# EAGLE board sch (EAGLE 9.6.2)
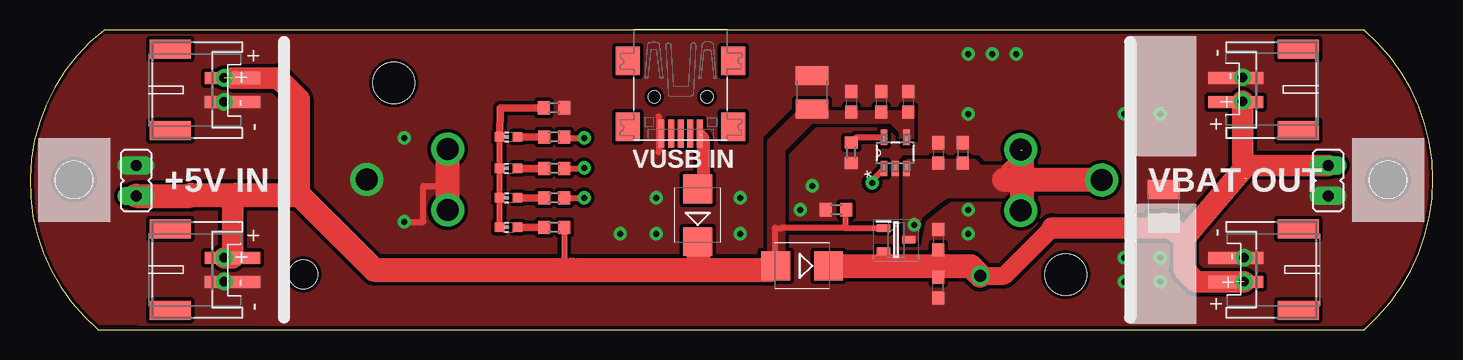
[diagram p0: board, top side]
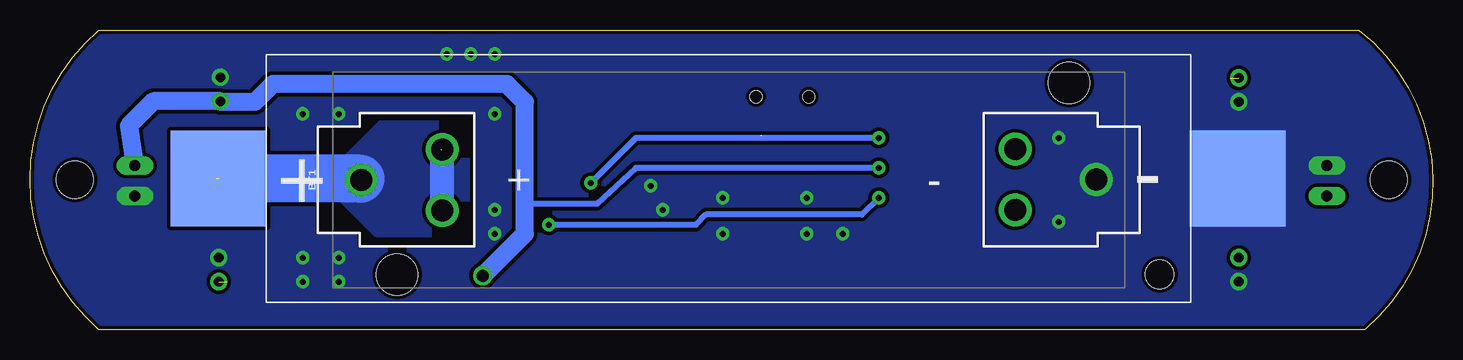
[diagram p1: board, bottom side, seen from below]

Size 116.91 x 25 mm. Coordinates in mm from the lower left corner, seen from the top.
Outline: 5.68,0 111.18,0 arc99 111.18,25 6.18,25 arc102 5.68,0
Copper layers (1*16): Top 0.035mm / dielectric 1.5mm / Bottom 0.035mm
Design rules "default *": minimum track width 12mil, minimum drill 0.35mm, track to track 12mil, track to pad 12mil, pad to pad 12mil, via to via 12mil, smd to smd 6mil, copper to edge 12mil, drill to drill 6mil, minimum pad ring 12mil, minimum via ring 12mil, stop-mask expansion 4mil, vias tented up to drill 33mil, thermal gap 10mil
Holes 3.1 mm at 3.68,12.5 113.18,12.5

## Footprints (pad centres in the part's own frame; a part is rotated, then mirrored left to right if it is on the bottom)
BATTERY_18650-HOLDER = drill 1.829: GND@1 30.628,0.01; GND@2 23.88,2.55; GND@3 23.88,-2.53; PWR@1 -30.628,-0.01; PWR@2 -23.88,2.53; PWR@3 -23.88,-2.55
C0603 = smd 1.1 x 1: 1 -0.85,0; 2 0.85,0
C1210 = smd 1.6 x 2.7: 1 -1.4,0; 2 1.4,0
USB-MINIB = smd 0.5 x 2.308: D+ 0,4.064; D- -0.8,4.064; GND 1.6,4.064; ID 0.8,4.064; VBUS -1.6,4.064 | smd 2 x 2.4: GND1 -4.4,-2; GND2 -4.4,3.5; GND3 4.4,3.5; GND4 4.4,-2 | hole 1: -2.2,1; 2.2,1
JST-PH-2-SMT-RA = smd 1 x 4.6: 1 1,-3.7; 2 -1,-3.7 | smd 1.6 x 3.4: NC1 -3.4,1.5; NC2 3.4,1.5
JST-PH-2-THM-RA = drill 0.8 pad 1.422: 1 1,0; 2 -1,0
SMB = smd 2.4 x 2.4: A 2.2,0; C -2.2,0
SOT96P240X100-3N = smd 1.1 x 0.65: 1 -1.05,0.96; 2 -1.05,-0.96; 3 1.05,0
JP1 = drill 0.914 long: 1 0,-1.27; 2 0,1.27
CHIP-LED0603 = smd 0.8 x 0.8: A 0,-0.75; C 0,0.75
R0603 = smd 1 x 1.1: 1 -0.85,0; 2 0.85,0
SMT18650_18650SMT = smd 8 x 8: BATTERY_NEGATIVE 80.98,10.32; BATTERY_POSITIVE -3.95,10.32 | hole 3.45: 66.925,18.325; 10.925,2.325 | hole 2.39: 74.455,2.325
SOT95P280X145-5N = smd 1.27 x 0.559: 1 -1.295,0.94; 2 -1.295,0; 3 -1.295,-0.94; 4 1.295,-0.94; 5 1.295,0.94

## Placement (x,y rotation side)
BT1  [BATTERY_18650-HOLDER]  58.68,12.5 0 bottom
C1  [C0603]  73.18,19 270 top
C2  [C0603]  77.71,14.74 270 top
C3  [C0603]  75.67,14.74 270 top
C4  [C0603]  70.93,19 270 top
C5  [C0603]  68.43,19 270 top
C6  [C0603]  75.68,3.5 90 top
C7  [C0603]  75.68,7.5 270 top
C8  [C1210]  65.18,19.8 90 top
C9  [C1210]  94.48,10.3 90 top
CN1  [USB-MINIB]  54.22,20.42 180 top
CN2  [JST-PH-2-SMT-RA]  104.18,5 270 top
CN3  [JST-PH-2-SMT-RA]  104.18,20 270 top
CN4  [JST-PH-2-THM-RA]  101.05,20.05 270 top
CN5  [JST-PH-2-THM-RA]  16.18,20 90 top
CN6  [JST-PH-2-THM-RA]  16.18,5 90 top
CN7  [JST-PH-2-THM-RA]  101.18,5 270 top
CN8  [JST-PH-2-SMT-RA]  13.18,20 90 top
CN9  [JST-PH-2-SMT-RA]  13.18,5 90 top
D1  [SMB]  64.34,5.31 180 top
D2  [SMB]  55.65,9.54 90 top
IC1  DMP1045U-7  [SOT96P240X100-3N]  72.18,7.5 0 top
JP2  [JP1]  108.17,12.43 0 top
JP3  [JP1]  8.84,12.43 0 top
LED1  [CHIP-LED0603]  39.88,13.45 90 top
LED2  [CHIP-LED0603]  39.88,10.99 90 top
LED3  [CHIP-LED0603]  39.88,8.53 90 top
LED4  [CHIP-LED0603]  39.88,16.07 90 top
R1  [R0603]  68.43,14.75 90 top
R2  [R0603]  67.18,10 0 top
R3  [R0603]  43.69,8.53 0 top
R4  [R0603]  43.69,10.99 0 top
R5  [R0603]  43.69,13.45 0 top
R6  [R0603]  43.69,16.07 0 top
R7  [R0603]  43.68,18.5 180 top
U$1  SMT18650_SMT18650  [SMT18650_18650SMT]  97.24,2.27 0 bottom
U$2  MCP73832T-2ACI/OT  [SOT95P280X145-5N]  72.11,14.74 90 top

## Library data of the parts
BT1 = SparkFun-Batteries; PROD_ID: BATT-12327; SF_SKU: PRT-13113
C1-C7 = resistor
C8 C9 = rcl; SPICEPREFIX: C
CN1-CN9 LED1-LED4 = adafruit
D1 D2 = diode
IC1 = DMP1045U-7; ALLIED_NUMBER: 70551254; ALLIED_PRICE/STOCK: http://www.alliedelec.com/diodes-inc-dmp1045u-7/70551254/; ARROW_PART_NUMBER: DMP1045U-7; ARROW_PRICE/STOCK: https://www.arrow.com/en/products/dmp1045u-7/diodes-incorporated; DESCRIPTION: P-Channel Enhancement MOSFET SOT-23 Diodes Inc DMP1045U-7 P-channel MOSFET Transistor, 5.2 A, -12 V, 3-Pin SOT23; HEIGHT: 1mm; MANUFACTURER_NAME: Diodes Inc.; MANUFACTURER_PART_NUMBER: DMP1045U-7; RS_PART_NUMBER: 8222605P; RS_PRICE/STOCK: http://uk.rs-online.com/web/p/products/8222605P
JP2 JP3 = jumper
R1-R7 = rcl; SPICEPREFIX: R
U$1 = al_dbl_battery
U$2 = Microchip_By_element14_Batch_1; MPN: MCP73832T-2ACI/OT; OC_FARNELL: 1332159; OC_NEWARK: 88K5656; PACKAGE: SOT-5; SUPPLIER: Microchip

## Nets
GND: BT1.GND@1 C1.1 C2.1 C3.1 C4.1 C5.1 C6.1 C7.1 C8.2 C9.2 CN1.GND CN2.2 CN3.2 CN4.2 CN5.2 CN6.2 CN7.2 CN8.2 CN9.2 JP2.1 JP3.2 R1.1 R2.1 R7.1 U$1.BATTERY_NEGATIVE U$2.2
N$1: BT1.PWR@1 C2.2 C3.2 IC1.3 R4.2 U$1.BATTERY_POSITIVE U$2.3
N$2: LED4.A R6.1
N$3: C1.2 C4.2 C5.2 C8.1 CN5.1 CN6.1 CN8.1 CN9.1 D1.A D2.C IC1.1 JP3.1 R2.2 R3.2 U$2.4
N$4: CN1.VBUS D2.A
N$5: R1.2 U$2.5
N$6: LED3.A R3.1
N$7: LED2.A R4.1
N$8: LED1.A R5.1
N$9: C6.2 C7.2 C9.1 CN2.1 CN3.1 CN4.1 CN7.1 D1.C IC1.2 JP2.2 R5.2
N$10: R6.2 U$2.1
N$12: LED1.C LED2.C LED3.C LED4.C R7.2

## Tracks (layer width: path | path; a pad name or v marks a point on that pad's centre or on a via)
GND  (via drill 0.5)
  Top 0.5: 52.38,17.8 52.38,14.8 | v31.18,9 32.77,9 32.77,12 34.78,12
  Top 2: 34.78,15 34.78,12 34.78,10
  other vias: 59.18,11 64.18,10 65.18,12 78.18,18 78.18,23 80.18,23 82.18,23 91.18,18 94.18,18 91.18,6 94.18,6 91.18,4 94.18,4 59.18,8 52.18,8 52.18,11 49.18,8 31.18,16 78.18,8 78.18,10
  pour Top (rank 2, no thermals): -0.82,26.5 -0.82,0.5 116.68,0 116.68,26
  pour Bottom (no thermals): -0.32,26 -0.32,0 117.68,0 117.68,26
N$1  (via drill 0.5)  (2 unrouted)
  Top 0.5: 82.68,15 81.19,13.51 81.19,12.49 | R4.2 v46.17,10.99 v46.18,11
  Top 2: BT1.PWR@1 81.19,12.49 81.18,12.5 | 82.68,10 82.68,15
  Bottom 0.5: v46.18,11 47.58,9.6 60.58,9.6 61.43,8.75 v73.68,8.75
  Bottom 2: 82.58,15 82.58,10
  Bottom 4: 89.38,12.6 101.38,12.6
  pour Top (no thermals): 72.93,7.5 73.73,7.5 74.13,9.5 75.68,10.75 76.43,11.25 83.18,11.25 83.18,13.5 79.18,13.5 78.68,14 73.18,14 72.93,13.75
  pour Bottom (no thermals): 80.78,17 80.78,8.2 87.98,8.2 92.18,12.4 87.58,17
N$2
  Top 0.61: LED4.A R6.1
N$3  (1 unrouted)
  Top 0.5: R3.2 44.54,5.64 45.18,5 | 67.93,8.46 IC1.1 | R2.2 67.93,9.9 67.93,8.46 | 62.08,8.4 62.58,8.4 62.58,8.46 67.93,8.46 | 62.08,8.4 62.08,8.5 | 62.08,8.4 62.08,5 61.83,5
  Top 1.8: CN6.1 CN9.1 16.88,10.95 17.18,11.25 | 17.18,21 CN8.1 20.68,21 22.43,19.25 22.43,11.25
  Top 2: JP3.1 13.34,11.16 13.43,11.25 17.18,11.25 22.43,11.25 28.68,5 45.18,5 55.68,5 | D2.C 55.68,7.31 55.68,5 | 55.68,5 61.83,5 D1.A
  pour Top (no thermals): 72.43,16 73.68,16 73.68,18.25 63.93,18.25 61.43,15.75 61.43,4.75 62.93,4.75 62.93,15 65.18,17.25 71.68,17.25 72.43,16.5
N$4  (1 unrouted)
  Top 0.152: CN1.VBUS 55.93,16.25 | 56.38,15.8 56.18,16
  Top 0.5: CN1.VBUS 55.82,11.91 D2.A | 56.38,15.8 56.38,11.8 | 56.18,16 56.18,12.6
  Top 0.813: 56.18,16 55.98,16.2 55.98,16.25 56.18,16.05 56.18,16
N$5
  Top 0.5: U$2.5 68.87,16.04 R1.2
N$6
  Top 0.61: R3.1 LED3.A
N$7
  Top 0.61: R4.1 LED2.A
N$8
  Top 0.61: R5.1 LED1.A
N$9  (via drill 0.5, 1)  (1 unrouted)
  Top 0.5: C7.2 75.68,5.31 | C6.2 78.37,5.96 78.37,5.31 | IC1.2 71.18,6.49 71.18,5.31 | R5.2 46.13,13.45 v46.18,13.5
  Top 0.813: CN3.1 100.53,19.05 CN4.1
  Top 1.5: v79.18,4.5 81.18,4.5 85.18,8.5
  Top 1.8: CN7.1 97.18,4 96.18,5 96.18,7.6 | CN4.1 101.05,14 101.35,13.7 | JP2.2 101.35,13.7 | 85.18,8.5 95.28,8.5 96.18,7.6 | 96.18,7.6 C9.1 | 96.18,7.6 101.35,13.7
  Top 2: D1.C 71.18,5.31 75.68,5.31 78.37,5.31 v79.18,4.5
  Bottom 0.5: v46.18,13.5 66.43,13.5 69.68,10.5 75.68,10.5
  Bottom 1.5: v79.18,4.5 75.68,8 75.68,10.5 75.68,19 77.18,20.5 96.68,20.5 98.18,19 101,19 CN4.1 106.63,19.05 108.67,17.01 JP2.2
N$10  (via drill 0.5)
  Top 0.5: U$2.1 70.18,12.45 v70.18,12.25 | R6.2 44.61,16 v46.18,16
  Bottom 0.5: v46.18,16 66.43,16 v70.18,12.25
N$12
  Top 0.5: LED3.C LED2.C LED1.C LED4.C
  Top 0.61: LED4.C 39.18,18.5 R7.2

## Text on the board
tPlace: VUSB IN | +5V IN | VBAT OUT